# EAGLE board slider (EAGLE 9.3.2)
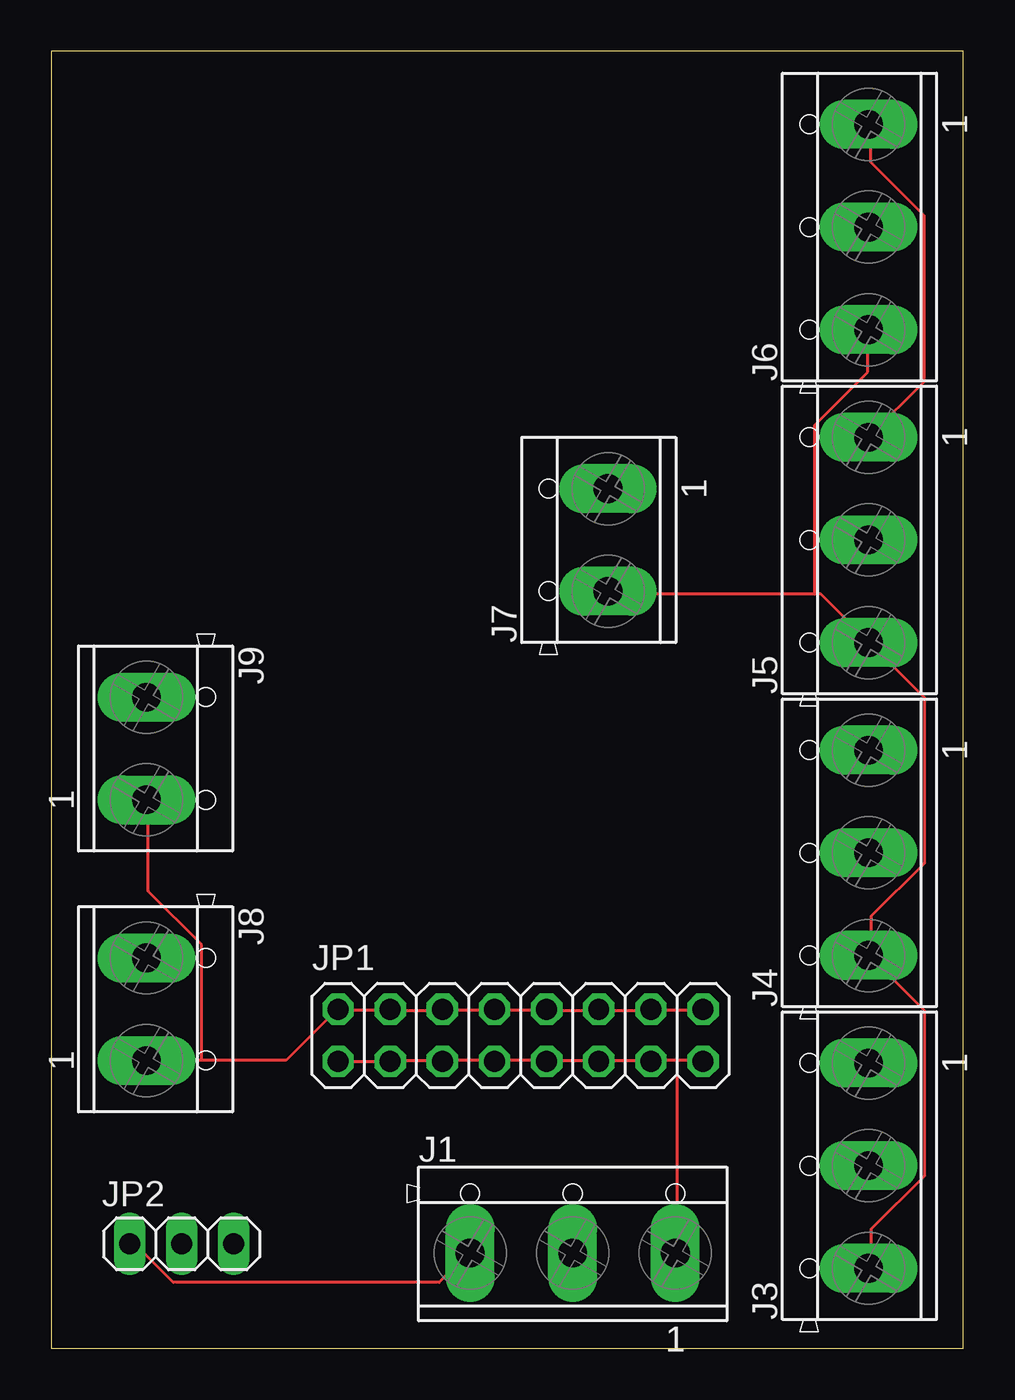
[diagram p0: board, top side]
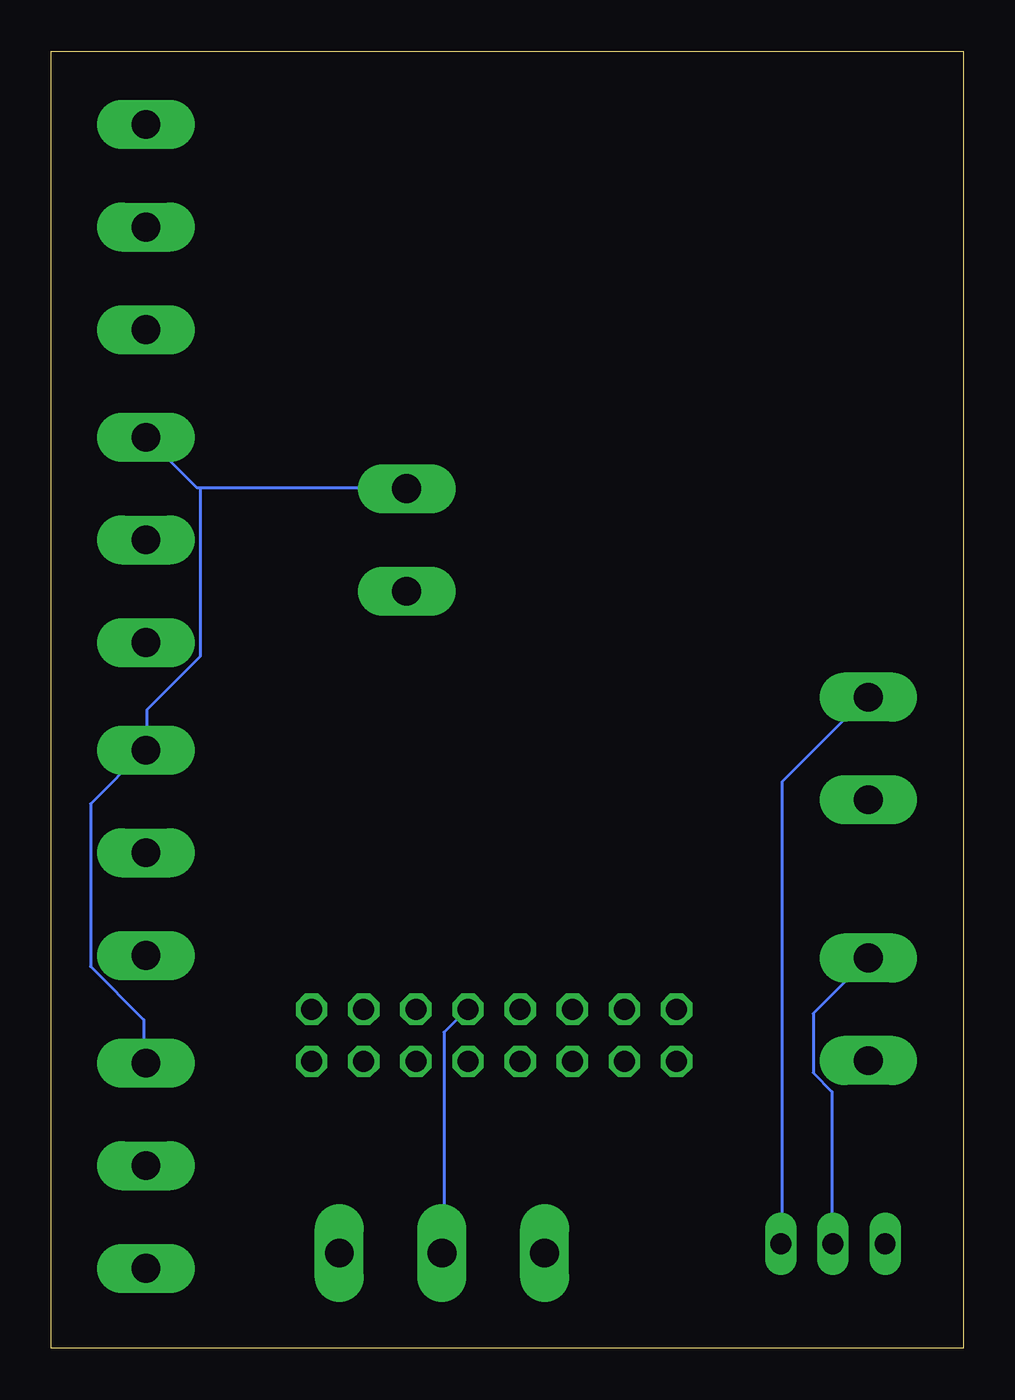
[diagram p1: board, bottom side, seen from below]

Size 44.43 x 63.17 mm. Coordinates in mm from the lower left corner, seen from the top.
Outline: 0,0 44.43,0 44.43,63.17 0,63.17 0,0
Copper layers (1*16): Top 0.035mm / dielectric 1.5mm / Bottom 0.035mm
Design rules "default": minimum track width 6mil, minimum drill 0.35mm, track to track 6mil, track to pad 6mil, pad to pad 6mil, via to via 6mil, smd to smd 6mil, copper to edge 40mil, drill to drill 6mil, minimum pad ring 10mil, minimum via ring 8mil, stop-mask expansion 4mil, vias tented up to drill 0mil, thermal gap 10mil

## Footprints (pad centres in the part's own frame; a part is rotated, then mirrored left to right if it is on the bottom)
TERMINAL_BLOCK_3P_5 = drill 1.4 pad 2.38 long: 1 5,-0.45; 2 0,-0.45; 3 -5,-0.45
TERMINAL_BLOCK_2P_5 = drill 1.4 pad 2.38 long: 1 2.5,-0.45; 2 -2.5,-0.45
2X08 = drill 1.016 octagon: 1 -8.89,-1.27; 2 -8.89,1.27; 3 -6.35,-1.27; 4 -6.35,1.27; 5 -3.81,-1.27; 6 -3.81,1.27; 7 -1.27,-1.27; 8 -1.27,1.27; 9 1.27,-1.27; 10 1.27,1.27; 11 3.81,-1.27; 12 3.81,1.27; 13 6.35,-1.27; 14 6.35,1.27; 15 8.89,-1.27; 16 8.89,1.27
1X03 = drill 1.016 long: 1 -2.54,0; 2 0,0; 3 2.54,0

## Placement (x,y rotation side)
J1  CON_TERMINAL_BLOCK_03-5MM  [TERMINAL_BLOCK_3P_5]  25.4,5.08 0 top
J3  CON_TERMINAL_BLOCK_03-5MM  [TERMINAL_BLOCK_3P_5]  39.37,8.89 90 top
J4  CON_TERMINAL_BLOCK_03-5MM  [TERMINAL_BLOCK_3P_5]  39.37,24.13 90 top
J5  CON_TERMINAL_BLOCK_03-5MM  [TERMINAL_BLOCK_3P_5]  39.37,39.37 90 top
J6  CON_TERMINAL_BLOCK_03-5MM  [TERMINAL_BLOCK_3P_5]  39.37,54.61 90 top
J7  CON_TERMINAL_BLOCK_02-5MM  [TERMINAL_BLOCK_2P_5]  26.67,39.37 90 top
J8  CON_TERMINAL_BLOCK_02-5MM  [TERMINAL_BLOCK_2P_5]  5.08,16.51 270 top
J9  CON_TERMINAL_BLOCK_02-5MM  [TERMINAL_BLOCK_2P_5]  5.08,29.21 270 top
JP1  [2X08]  22.86,15.24 0 top
JP2  [1X03]  6.35,5.08 0 top

## Library data of the parts
J1 J8 J9 = dp_devices.v6
J3-J7 = dp_devices
JP1 JP2 = pinhead

## Nets
N$1: J1.1 JP1.1 JP1.3 JP1.5 JP1.7 JP1.9 JP1.11 JP1.13 JP1.15
N$3: J1.2 J8.1 J9.1 JP1.2 JP1.4 JP1.6 JP1.8 JP1.10 JP1.12 JP1.14 JP1.16
N$4: J1.3 JP2.1
N$5: J8.2 JP2.2
N$6: J3.1 J4.1 J5.1 J6.1 J7.1
N$7: J9.2 JP2.3
N$9: J3.3 J4.3 J5.3 J6.3 J7.2

## Tracks (layer width: path | path; a pad name or v marks a point on that pad's centre or on a via)
N$1
  Top 0.152: 19.05,14.02 16.61,14.02 JP1.3 JP1.1 | 30.48,14.02 31.7,14.02 JP1.15 | 30.48,14.02 29.26,14.02 JP1.13 29.11,14.02 26.67,14.02 | 26.67,14.02 24.23,14.02 JP1.9 24.08,14.02 21.64,14.02 JP1.7 21.49,14.02 19.05,14.02 | 26.67,14.02 JP1.11 | 19.05,14.02 JP1.5 | 30.48,14.02 30.48,4.72 J1.1
N$3
  Top 0.152: 19.05,16.46 16.61,16.46 JP1.4 16.46,16.46 14.02,16.46 JP1.2 13.87,16.46 11.43,14.02 7.31,14.02 | JP1.16 31.7,16.46 29.26,16.46 JP1.14 29.11,16.46 26.67,16.46 | 26.67,16.46 24.23,16.46 JP1.10 24.08,16.46 21.64,16.46 JP1.8 21.49,16.46 19.05,16.46 | 26.67,16.46 JP1.12 | 19.05,16.46 JP1.6 | 7.31,14.02 4.72,14.02 J8.1 | 7.31,14.02 7.31,19.66 4.72,22.25 4.72,26.67 J9.1
  Bottom 0.152: J1.2 25.3,4.72 25.3,15.39 24.23,16.46 JP1.10
N$4
  Top 0.152: JP2.1 3.81,5.03 4.11,5.03 5.94,3.2 18.9,3.2 20.27,4.57 J1.3
N$5
  Bottom 0.152: JP2.2 6.4,5.18 6.4,12.5 7.31,13.41 7.31,16.31 4.72,18.9 J8.2
N$6
  Top 0.152: J6.1 39.93,59.59 39.93,57.76 42.52,55.17 42.52,47.09 39.93,44.5 J5.1
  Bottom 0.152: J3.1 39.93,14.02 39.93,16 42.52,18.59 42.52,26.52 39.93,29.11 J4.1 39.78,29.26 39.78,31.09 37.19,33.68 37.19,41.91 | 37.19,41.91 37.34,41.91 39.78,44.35 J5.1 | 37.19,41.91 27.13,41.91 J7.1
N$7
  Bottom 0.152: JP2.3 8.84,5.18 8.84,27.58 4.72,31.7 J9.2
N$9
  Top 0.152: J3.3 39.93,3.96 39.93,5.79 42.52,8.38 42.52,16.46 39.93,19.05 J4.3 39.93,19.2 39.93,21.03 42.52,23.62 42.52,31.7 39.93,34.29 J5.3 39.78,34.44 37.49,36.73 37.19,36.73 | 37.19,36.73 27.13,36.73 J7.2 | 37.19,36.73 37.19,44.96 39.78,47.55 39.78,49.53 J6.3